# EAGLE board customizedMotionSensorSchematic (EAGLE 9.6.2)
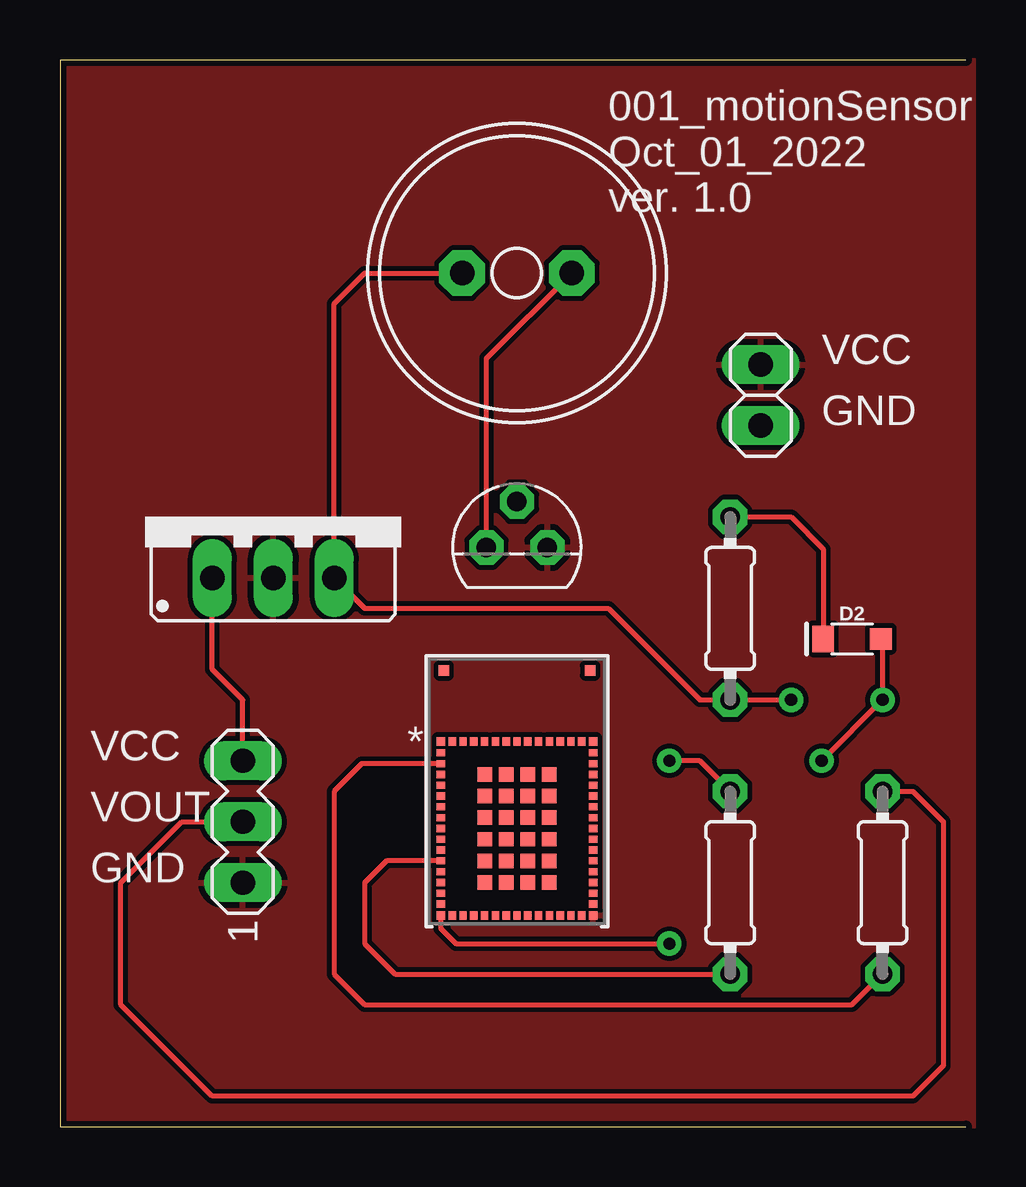
[diagram p0: board, top side]
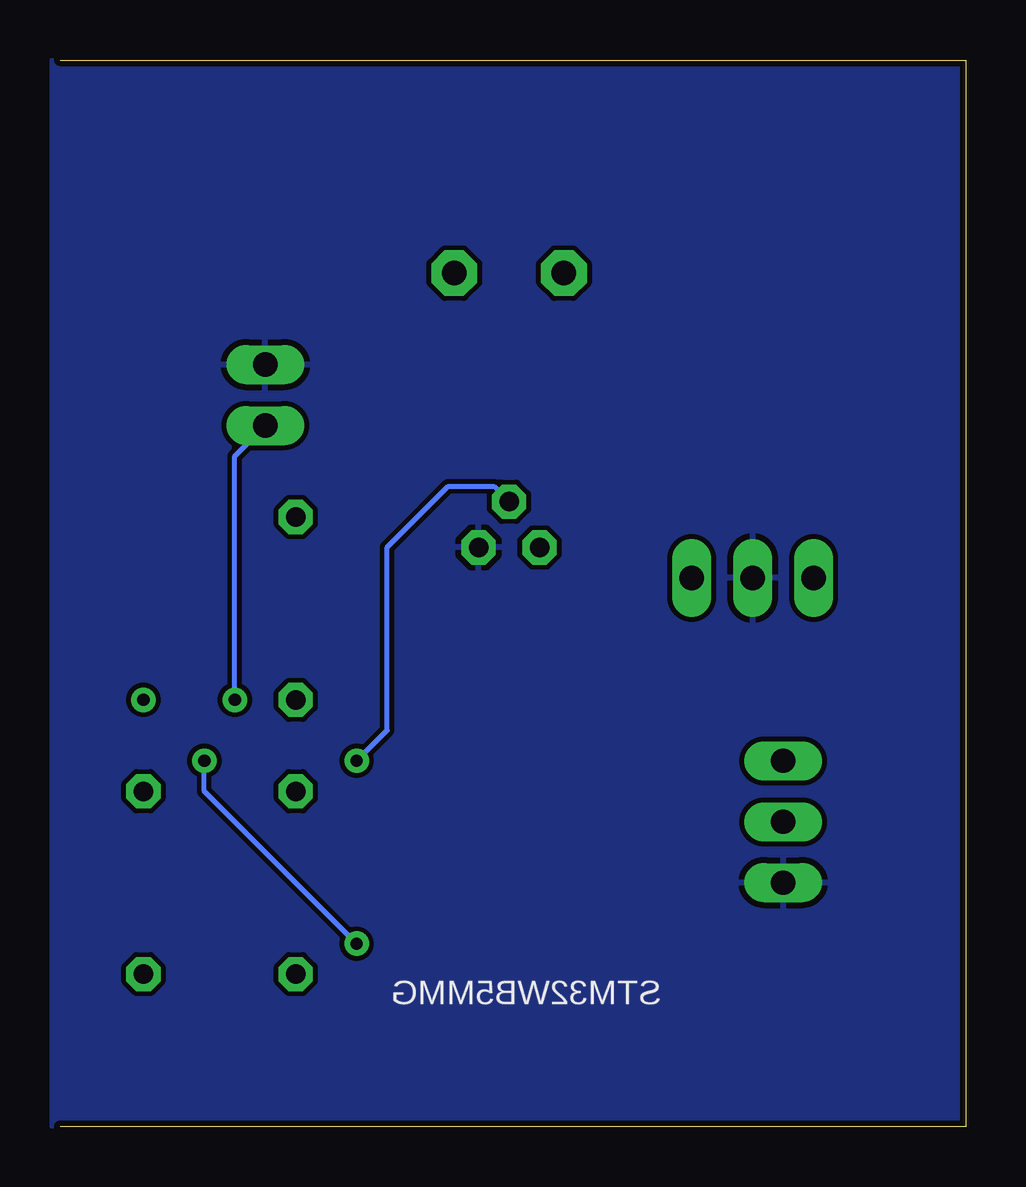
[diagram p1: board, bottom side, seen from below]

Size 37.77 x 44.44 mm. Coordinates in mm from the lower left corner, seen from the top.
Outline: 37.77,0 0,0 0,44.44 37.77,44.44
Copper layers (1*16): Top 0.035mm / dielectric 1.5mm / Bottom 0.035mm
Design rules "SparkFun": minimum track width 8mil, minimum drill 20mil, track to track 8mil, track to pad 8mil, pad to pad 8mil, via to via 8mil, smd to smd 8mil, copper to edge 10mil, drill to drill 8mil, minimum pad ring 12mil, minimum via ring 10mil, stop-mask expansion 4mil, vias tented up to drill 25mil, thermal gap 10mil

## Footprints (pad centres in the part's own frame; a part is rotated, then mirrored left to right if it is on the bottom)
PANASONIC_SMINI2-F5-B = smd 0.9 x 0.9: A 1.2,0 | smd 0.9 x 1.1: C -1.2,0
78XXS = drill 1.016 long: GND 0,-2.54; IN -2.54,-2.54; OUT 2.54,-2.54
1X02 = drill 1.016 long: 1 -1.27,0; 2 1.27,0
TO92 = drill 0.813 octagon: 1 1.27,0; 2 0,1.905; 3 -1.27,0
0204/7 = drill 0.813 octagon: 1 -3.81,0; 2 3.81,0
AL11P = drill 1.016 pad 1.905 octagon: + 2.286,0; - -2.286,0
MA03-1 = drill 1.016 long: 1 -2.54,0; 2 0,0; 3 2.54,0
SIP-LGA86_STM = smd 0.35 x 0.35: 1 -3.175,2.075; 17 -3.175,-5.175; 31 3.175,-5.175; 47 3.175,2.075 | smd 0.35 x 0.3: 2 -3.175,1.6; 3 -3.175,1.15; 4 -3.175,0.7; 5 -3.175,0.25; 6 -3.175,-0.2; 7 -3.175,-0.65; 8 -3.175,-1.1; 9 -3.175,-1.55; 10 -3.175,-2; 11 -3.175,-2.45; 12 -3.175,-2.9; 13 -3.175,-3.35; 14 -3.175,-3.8; 15 -3.175,-4.25; 16 -3.175,-4.7; 32 3.175,-4.7; 33 3.175,-4.25; 34 3.175,-3.8; 35 3.175,-3.35; 36 3.175,-2.9; 37 3.175,-2.45; 38 3.175,-2; 39 3.175,-1.55; 40 3.175,-1.1; 41 3.175,-0.65; 42 3.175,-0.2; 43 3.175,0.25; 44 3.175,0.7; 45 3.175,1.15; 46 3.175,1.6 | smd 0.3 x 0.35: 18 -2.7,-5.175; 19 -2.25,-5.175; 20 -1.8,-5.175; 21 -1.35,-5.175; 22 -0.9,-5.175; 23 -0.45,-5.175; 24 0,-5.175; 25 0.45,-5.175; 26 0.9,-5.175; 27 1.35,-5.175; 28 1.8,-5.175; 29 2.25,-5.175; 30 2.7,-5.175; 48 2.7,2.075; 49 2.25,2.075; 50 1.8,2.075; 51 1.35,2.075; 52 0.9,2.075; 53 0.45,2.075; 54 0,2.075; 55 -0.45,2.075; 56 -0.9,2.075; 57 -1.35,2.075; 58 -1.8,2.075; 59 -2.25,2.075; 60 -2.7,2.075 | smd 0.6 x 0.6: 61 -1.35,0.7; 62 -1.35,-0.2; 63 -1.35,-1.1; 64 -1.35,-2; 65 -1.35,-2.9; 66 -1.35,-3.8; 67 -0.45,-3.8; 68 0.45,-3.8; 69 1.35,-3.8; 70 1.35,-2.9; 71 1.35,-2; 72 1.35,-1.1; 73 1.35,-0.2; 74 1.35,0.7; 75 0.45,0.7; 76 -0.45,0.7; 77 -0.45,-0.2; 78 -0.45,-1.1; 79 -0.45,-2; 80 -0.45,-2.9; 81 0.45,-2.9; 82 0.45,-2; 83 0.45,-1.1; 84 0.45,-0.2 | smd 0.43 x 0.43: 85 -3.05,5.035; 86 3.05,5.035

## Placement (x,y rotation side)
D2  15V  [PANASONIC_SMINI2-F5-B]  33.02,20.32 0 top
IC1  [78XXS]  8.89,25.4 0 top
JP1  [1X02]  29.21,30.48 90 top
Q1  BC547B  [TO92]  19.05,24.13 0 top
R1  0.5K  [0204/7]  27.94,21.59 270 top
R2  1K  [0204/7]  34.29,10.16 90 top
R3  1K  [0204/7]  27.94,10.16 270 top
SP1  AL11P  [AL11P]  19.05,35.56 0 top
SV1  [MA03-1]  7.62,12.7 90 top
U1  STM32WB5MMGH6TR  [SIP-LGA86_STM]  19.05,13.97 0 top

## Library data of the parts
D2 = SparkFun-DiscreteSemi; PROD_ID: DIO-12989
IC1 = v-reg
JP1 = pinhead
Q1 = transistor-npn
R1-R3 = rcl; SPICEPREFIX: R
SP1 = buzzer; OC_FARNELL: unknown; OC_NEWARK: unknown
SV1 = con-lstb; OC_FARNELL: unknown; OC_NEWARK: unknown
U1 = STM32W; COPYRIGHT: Copyright (C) 2022 Ultra Librarian. All rights reserved.; MANUFACTURER_PART_NUMBER: STM32WB5MMGH6TR; MFR_NAME: STMicroelectronics

## Nets
GND: IC1.GND JP1.2 Q1.1 SV1.1 U1.31
IN1: R2.1 U1.3
N$1: R2.2 SV1.2
N$4: D2.C R1.1
N$5: Q1.3 SP1.+
N$6: IC1.IN SV1.3
N$8: Q1.2 R3.1
OUT1: R3.2 U1.12
VBAT: U1.15
VCC: IC1.OUT JP1.1 R1.2 SP1.-
VDD: D2.A U1.17
VDDA_2: U1.6
VDDUSB: U1.32
VREF+: U1.4
VSS: U1.86
VSS_2: U1.5
VSS_3: U1.16
VSS_5: U1.57
VSS_6: U1.60
VSS_7: U1.84

## Tracks (layer width: path | path; a pad name or v marks a point on that pad's centre or on a via)
GND
  pour Bottom: 0,0 38.1,0 38.1,44.45 0,44.45
  pour Top: 0,0 38.1,0 38.1,44.45 0,44.45
IN1
  Top 0.203: U1.3 12.58,15.12 11.43,13.97 11.43,6.35 12.7,5.08 33.02,5.08 R2.1
N$1
  Top 0.203: R2.2 35.56,13.97 36.83,12.7 36.83,2.54 35.56,1.27 6.35,1.27 2.54,5.08 2.54,10.16 5.08,12.7 SV1.2
N$4
  Top 0.203: R1.1 30.48,25.4 31.82,24.06 D2.C
N$5
  Top 0.203: SP1.+ 17.78,32 Q1.3
N$6
  Top 0.203: SV1.3 7.62,17.78 6.35,19.05 IC1.IN
N$8  (via drill 0.51)
  Top 0.203: R3.1 26.67,15.24 v25.4,15.24
  Bottom 0.203: Q1.2 19.68,26.67 21.59,26.67 24.13,24.13 24.13,16.51 v25.4,15.24
OUT1
  Top 0.203: U1.12 13.61,11.07 12.7,10.16 12.7,7.62 13.97,6.35 R3.2
VCC  (via drill 0.51)
  Top 0.203: SP1.- 12.7,35.56 11.43,34.29 IC1.OUT 12.7,21.59 22.86,21.59 26.67,17.78 R1.2 v30.48,17.78
  Bottom 0.203: v30.48,17.78 30.48,27.94 JP1.1
VDD  (via drill 0.51)
  Top 0.203: D2.A 34.29,20.25 v34.29,17.78 v31.75,15.24 | U1.17 15.87,8.25 16.51,7.62 v25.4,7.62
  Bottom 0.203: v25.4,7.62 31.75,13.97 v31.75,15.24

## Text on the board
tPlace: 001_motionSensor / Oct_01_2022 / ver. 1.0 | VCC | GND | VCC | VOUT | GND
bPlace: STM32WB5MMG